# Altium PCB PCB1.PcbDoc
Units mm, origin at the board's own origin, x right, y up, seen from the top; angles counter-clockwise.
Board outline 28.9 x 13.5 mm, 2 copper layers (Top Layer, Bottom Layer); 23 components, 18 nets, 67 pads, 8 vias.
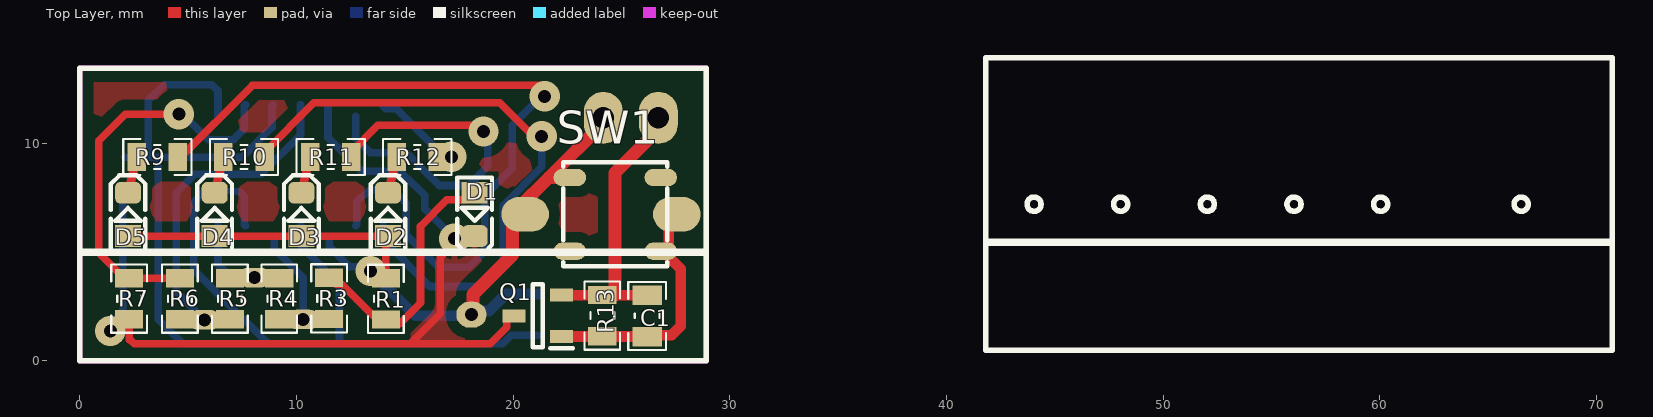
[diagram p0: Top Layer view]
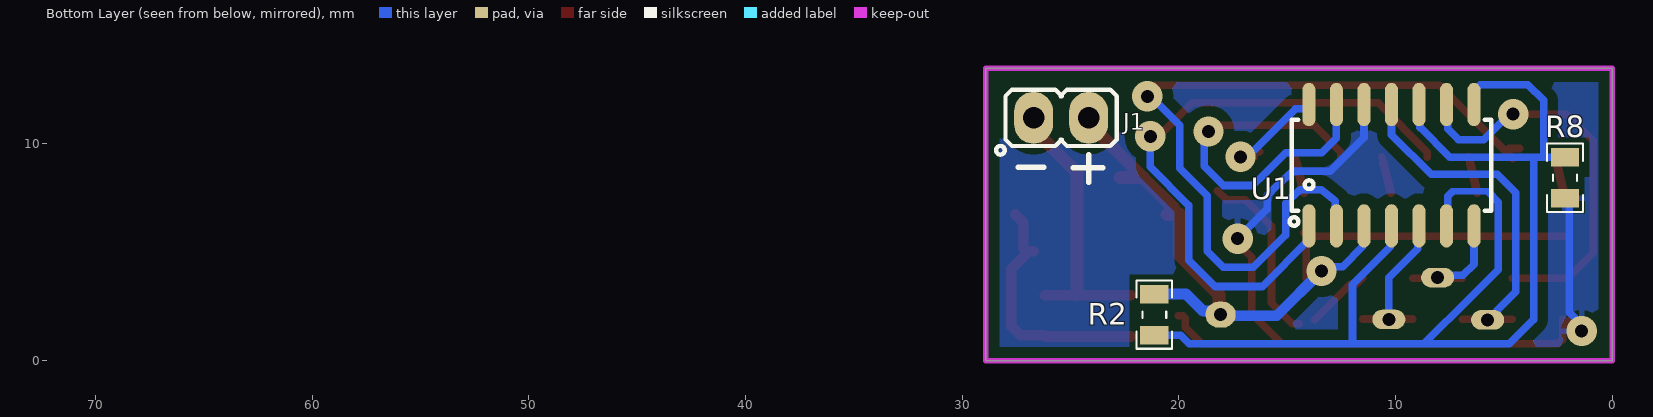
[diagram p1: Bottom Layer view, seen from below]
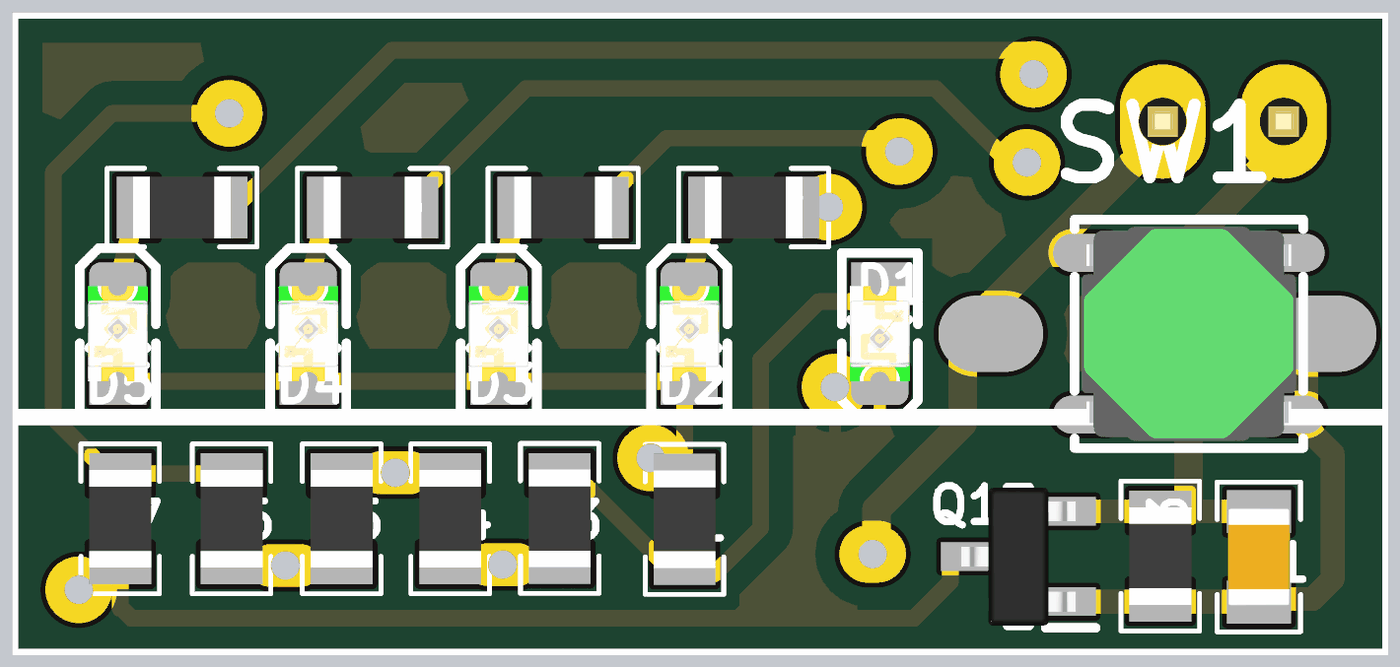
[diagram p2: 3D render of the assembled board from above, using the file's embedded part models]
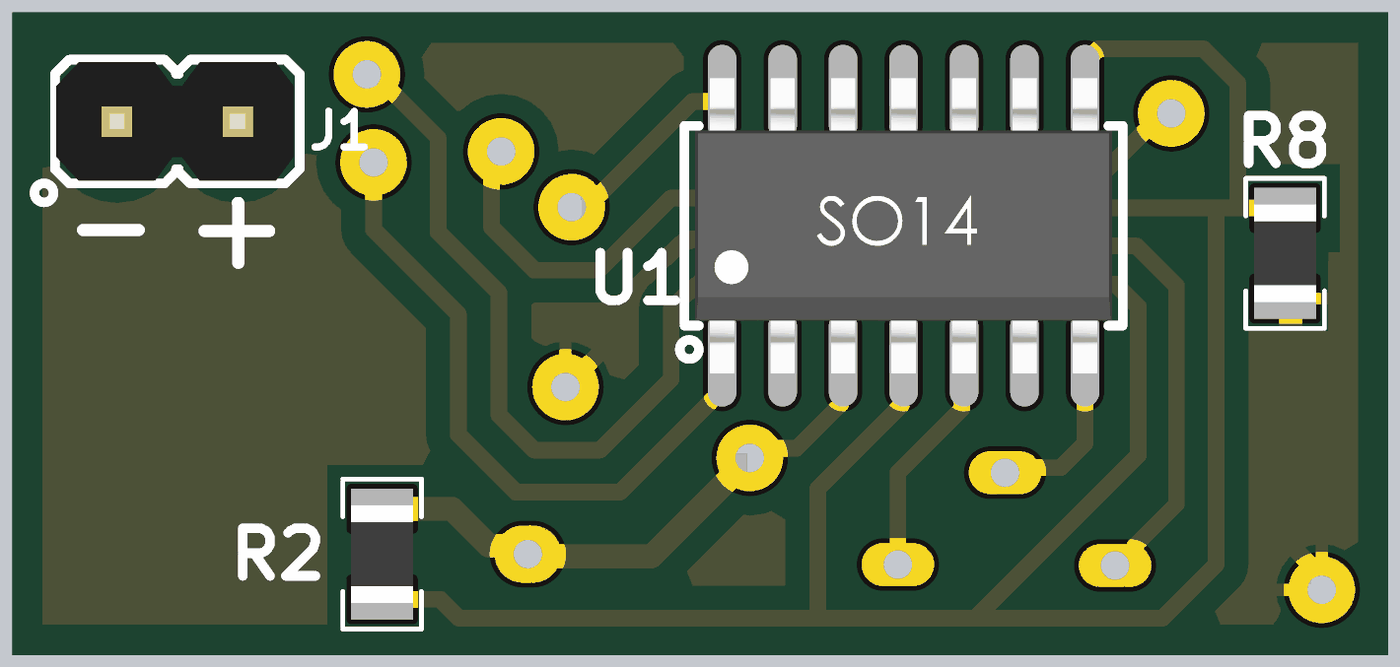
[diagram p3: 3D render of the assembled board from below, using the file's embedded part models]

## Layer stack, top to bottom
Top Solder: solder mask 0.0102, Solder Resist, Dk 3.5
Top Layer: signal copper 0.0356
Dielectric 1: dielectric 0.32, FR-4, Dk 4.8
Bottom Layer: signal copper 0.0356
Bottom Solder: solder mask 0.0102, Solder Resist, Dk 3.5

## Board outline
0,0 0,13.5 28.9,13.5 28.9,0

## Design rules (kind name [scope] priority, off if disabled: settings)
Clearance Clearance_1 [InNamedPolygon('G_Drain') Or InNamedPolygon('G_Drain')] p1: gap=0.5 ignorepadtopadclearanceinfootprint=FALSE
Clearance [All] p2: gap=0.45 ignorepadtopadclearanceinfootprint=FALSE
PolygonConnect [All] p1: connectstyle=Relief reliefconductorwidth=0.254 reliefentries=4 polygonreliefangle="90 Angle" airgapwidth=0.254
RoutingVias [All] p1: holewidth=0.7 width=1.4 viastyle="Through Hole" minholewidth=0.6 minwidth=1.27 maxholewidth=0.711 maxwidth=1.4
SolderMaskExpansion [All] p1: expansion=0.102 istentingtop=FALSE
Width [All] p1: maxlimit=0.8 minlimit=0.254 preferedwidth=0.35
30 further rules are at their usual default settings.

## Components (designator, comment, footprint, x,y, rotation, side; value= is the part's Value field where it differs from the comment)
C1 "4.7uF" CAP0805 26.18,2.06 r270 top value=100nF
D1 "LED805RED" LED0805RED 18.22,6.75 r270 top
D2 "LED805RED" LED0805RED 14.22,6.75 r90 top
D3 "LED805YLW" LED0805YLW 10.22,6.75 r90 top
D4 "LED805YLW" LED0805YLW 6.22,6.75 r90 top
D5 "LED805GRN" LED0805GRN 2.22,6.75 r90 top
J1 "HDRM2" HDR_M_1X2 25.43,11.21 r180 bottom
Q1 "SI2302DS" SOT95P230X110-3N 21.13,2.07 r180 top
R1 "150R" RES0805 14.12,2.85 r90 top
R2 "10K" RES0805 21.13,2.12 r90 bottom
R3 "4.7K" RES0805 11.5,2.87 r90 top
R4 "1K" RES0805 9.2,2.86 r270 top
R5 "1K" RES0805 6.92,2.86 r90 top
R6 "1K" RES0805 4.61,2.86 r270 top
R7 "10K" RES0805 2.27,2.86 r90 top
R8 "7.4K" RES0805 2.17,8.44 r90 bottom
R9 "100R" RES0805 3.57,9.4 r180 top
R10 "100R" RES0805 7.57,9.4 r180 top
R11 "100R" RES0805 11.57,9.4 r180 top
R12 "100R" RES0805 15.57,9.4 r180 top
R13 "820K" RES0805 24.11,2.08 r270 top
SW1 "PUSHBUTTON" SWPBS_SPDT_4X4SKRM 24.71,6.75 r0 top
U1 "LM339" SO_14 10.18,9.02 r90 bottom

## Footprints (in the part's own frame and the unit in brackets; to place one, negate y for a bottom-side part, rotate by r counter-clockwise, add the part's x,y. Pads: shape width x height; smd on the part's side, far side on the other; paste and mask are expansions set on the pad)
CAP0805 [mm] "Chip Capacitor, 2-Leads, Body 2/00x1/25mm, IPC Medium Density DESIGNER:ABBAS BASEREH"
  rect 0.9x1.35 smd: 1(-0.95,0) 2(0.95,0)
  silkscreen extent -1.58,-0.87 1.58,0.87, body extent -1.02,-0.65 1.02,0.65, height 0.5
HDR_M_1X2 [mm] "Connector; Header; 2 Position"
  oval 1.8x2.4 hole 1 mask+0.1: 1(-1.27,0) 2(1.27,0)
  silkscreen extent -3,-1.7 2.57,1.3, body extent -2.54,-1.25 2.44,1.25, height 8.72
LED0805GRN [mm] "LED SMD 0805, GREEN"
  rect 1x1.2 smd mask+0.075: 1(-1,0)
  rrect50% 1x1.2 smd mask+0.075: 2(1,0)
  Top Layer pour cut-out: -0.5,0.8 0.5,0.8 0.5,-0.8 -0.5,-0.8
  silkscreen extent -1.7,-0.8 1.8,0.8, body extent -1,-0.63 1,0.63, height 0.7
LED0805RED [mm] "LED SMD 0805, RED"
  rect 1x1.2 smd mask+0.075: 1(-1,0)
  rrect50% 1x1.2 smd mask+0.075: 2(1,0)
  Top Layer pour cut-out: -0.5,0.8 0.5,0.8 0.5,-0.8 -0.5,-0.8
  silkscreen extent -1.7,-0.8 1.8,0.8, body extent -1,-0.63 1,0.63, height 0.7
LED0805YLW [mm] "LED SMD 0805, YELLOW"
  rect 1x1.2 smd mask+0.075: 1(-1,0)
  rrect50% 1x1.2 smd mask+0.075: 2(1,0)
  Top Layer pour cut-out: -0.5,0.8 0.5,0.8 0.5,-0.8 -0.5,-0.8
  silkscreen extent -1.7,-0.8 1.8,0.8, body extent -1,-0.63 1,0.63, height 0.7
RES0805 [mm] "Chip Resistor, 2-Leads, Body 2/00x1/25mm, IPC Medium Density DESIGNER:ABBAS BASEREH"
  rect 0.85x1.3 smd: 1(-0.95,0) 2(0.95,0)
  silkscreen extent -1.58,-0.82 1.58,0.82, body extent -1.02,-0.65 1.02,0.65, height 0.5
SO_14 [mm] "SOP, SOIC, 3.9mm width, 1.27mm pitch,"
  oval 2x0.6 smd: 1(-2.8,3.81) 2(-2.8,2.54) 3(-2.8,1.27) 4(-2.8,0) 5(-2.8,-1.27) 6(-2.8,-2.54) 7(-2.8,-3.81) 8(2.8,-3.81) 9(2.8,-2.54) 10(2.8,-1.27) 11(2.8,0) 12(2.8,1.27) 13(2.8,2.54) 14(2.8,3.81)
  silkscreen extent -2.8,-4.6 2.1,4.7, body extent -3.1,-4.37 3.1,4.38, height 1.75
SOT95P230X110-3N [mm]
  rect 1.05x0.6 smd: 1(-1.1,0.95) 2(-1.1,-0.95) 3(1.1,0)
  silkscreen extent -1.63,-1.45 0.23,1.5, body extent -1.2,-1.45 1.2,1.45, height 0.95
SWPBS_SPDT_4X4SKRM [mm] "SWITCH, PUSHBUTTON, SMD, SPDT, SKRM Series ; Height 0.4 mm ; 500,000 cycles ; 1.57N Force, SKRMAAE010"
  oval 1.5x0.8 smd mask+0.1: 1(-2.1,1.7) 2(-2.1,-1.7) 3(2.1,-1.7) 4(2.1,1.7)
  silkscreen extent -2.4,-2.4 2.4,2.4, body extent -2.25,-2.25 2.25,2.25, height 0.4

## Part data
C1: library part "CAP SMD PACKAGE", "TOTAL CAPACITOR SMD PACK", Data=2017-3-10, Desc.="CAP SMD TOTAL PACKAGES", Designer="Abbas Basereh"
D1 D2: library part LED_SMD_0805_RED, "LED, SMD, 0805, RED", ASSEMBLY=ASSEMBLY, DESC=DESCRIPTION, MANF=MANF, MANF_P#=MANF_PART#, PARAM2=2.2V, PRICE=36t@Javan
D3 D4: library part LED_SMD_0805_YLW, "LED, SMD, 0805, YELLOW", ASSEMBLY=ASSEMBLY, DESC=DESCRIPTION, MANF=MANF, MANF_P#=MANF_PART#, PARAM2=2.2V, PRICE=36t@Javan
D5: library part LED_SMD_0805_GRN, "LED, SMD, 0805, GREEN", ASSEMBLY=ASSEMBLY, DESC=DESCRIPTION, MANF=-, MANF_P#=-, PARAM=20mA, PARAM2=2.2V, PRICE=36t@Javan
J1: library part HDR_M_1X2, "CONN, HEADER, Male, pitch: 2.54mm, 2POS"
Q1: "MOSFET (N-Channel)", Manufacturer_Name=Nexperia, Mouser Part Number=N/A, Datasheet Link=https://assets.nexperia.com/documents/data-sheet/SI2302DS.pdf, Height=1.1mm, Manufacturer_Part_Number=SI2302DS, Mouser Price/Stock=https://www.mouser.com/Search/Refine.aspx?Keyword=N%2FA
R1 R2 R3 R4 R5 R6 R7 R8 R9 R10 R11 R12 R13: library part "RES SMD PACKAGE", "TOTAL SMD RESISTOR PACK", Data=2017-3-10, Desc.="RES SMD PAKAGES", Designer="Abbas Basereh"
SW1: library part SWPBS_SPDT_4X4_SKRMAAE010, "SWITCH, PUSH BUTTON, TACTILE, SMD, SPDT, 4X4MM", ASSEMBLY=ASSEMBLY, DESC=DESCRIPTION, MANF=ALPS, MANF_P#=SKRMAAE010, PARAM=PARAM, PRICE=PRICE
U1: library part LM339_SOP14, "Comparator, Quad", MANF="ST, Texas Instruments, ON", MANF_P#="LM339DT, LM339ADT, LM339MX, LM339AMX, LM339M, LM339AM, LM339DR2G", PARAM2="+2~+36 V, ±1~±18V"

## Free pads (board coordinates)
  oval 1.524x0.9 hole 0.6: 2(5.74,1.88) 2(10.3,1.9) 3(8.05,3.83)
  oval 1.4x1.2 hole 0.6: 4(18.07,2.12)
  oval 2.2x1.6 smd: 5(20.55,6.75) 6(27.55,6.75)

## Via types
v1: diameter 1.4, hole 0.6, Top Layer to Bottom Layer, 8 vias

## Nets (pads, with @x,y where several pads share a name; then routed paths per layer and width w, separated by ;. In a path a pad name is that pad's centre, name@x,y a point inside that pad or via, vN(x,y) a via of type N, cw(c..) or ccw(c..) an arc to the next point about the centre after c; other vN are vias at no path point)
3.7V: D2.1 D3.1 D4.1 D5.1 J1.2 pad.4 pad.5 R1.2 R2.2 SW1.1 U1.3 | length 38.4
  Top Layer w0.35: D5.1 D4.1 D3.1 14.07,5.75 D2.1@14.22,5.9 ; R1.2 D2.1@14.12,5.52
  Top Layer w0.6: pad.4 18.151,2.201 18.151,3.061 19.96,4.87 19.96,6.76 19.97,6.75 pad.5 ; pad.5@20.25,7.05 21.65,8.45 ; SW1.1@22.71,8.45 21.65,8.45 ; J1.2 24.16,10.96 21.65,8.45
  Bottom Layer w0.35: U1.3@11.45,5.69 11.498,5.642 11.498,5.272 12.429,4.341 v1@13.209,4.341 ; pad.4@17.985,2.07 pad.4@18.211,2.296
  Bottom Layer w0.5: v1@13.209,4.341 v1(13.41,4.14) 15.48,2.07 pad.4@17.985,2.07 ; pad.4@18.211,2.296 18.886,2.296 19.66,3.07 R2.2
G_Drain: D1.2 Q1.3 R7.1 R8.1 U1.12 | length 41.8
  Top Layer w0.35: R7.1@1.95,1.88 R7.1@2.25,1.58 ; R7.1 2.27,0.975 2.301,0.975 2.506,0.77 15.24,0.77 ; v1(17.28,5.63) 17.28,5.43 16.63,4.78 16.63,2.16 15.24,0.77 ; Q1.3 19.827,2.07 19.702,1.945 19.702,1.532 18.94,0.77 15.24,0.77
  Bottom Layer w0.35: v1(1.4,1.37) 1.4,1.654 1.98,2.234 R8.1@1.98,7.49 ; U1.12 11.45,10.295 13,8.745 14.746,8.745 15.207,8.325 15.705,7.835 15.91,7.63 15.91,7 v1@17.36,5.55
GND: C1.1 J1.1 Q1.2 R13.1 | length 13
  Top Layer w0.35: R13.1@24.11,3.02 R13.1@24.115,3.025 ; R13.1 R13.1@24.115,3.025 ; R13.1@24.12,3.02 R13.1@24.115,3.025 ; C1.1@26.17,3.02 C1.1
  Top Layer w0.5: Q1.2 R13.1@24.11,3.02 ; R13.1@24.12,3.02 24.7,3.02 C1.1@26.17,3.02
  Top Layer w0.6: R13.1@24.7,3.02 24.7,8.67 26.7,10.67 J1.1
NetC1_2: C1.2 pad.6 Q1.1 R13.2 SW1.3 | length 11.7
  Top Layer w0.35: C1.2@26.17,1.12 C1.2
  Top Layer w0.5: Q1.1 C1.2@26.17,1.12 ; C1.2 26.243,1.173 27.303,1.173 27.73,1.6 27.73,4.23 SW1.3@26.91,5.05 ; SW1.3@26.71,5.05 SW1.3 SW1.3@26.91,5.05 ; pad.6 27.18,6.38 27.18,5.189 27.041,5.05 SW1.3@26.91,5.05
NetD1_1: D1.1 R1.1 R3.2 | length 11.4
  Top Layer w0.35: R3.2 11.798,3.522 12.088,3.522 R1.1@13.72,1.89 ; R1.1@14.43,1.71 14.76,1.71 15.72,2.67 15.72,6.21 16.935,7.425 17.795,7.425 D1.1@18.22,7.85
NetD2_2: D2.2 R12.2 | length 1.7
  Top Layer w0.35: R12.2@14.548,9.103 R12.2
  Top Layer w0.4: D2.2 R12.2@14.548,9.103
NetD3_2: D3.2 R11.2 | length 1.7
  Top Layer w0.35: R11.2@10.548,9.103 R11.2
  Top Layer w0.4: D3.2 R11.2@10.548,9.103
NetD4_2: D4.2 R10.2 | length 1.7
  Top Layer w0.35: R10.2@6.548,9.103 R10.2
  Top Layer w0.4: D4.2 R10.2@6.548,9.103
NetD5_2: D5.2 R9.2 | length 1.7
  Top Layer w0.35: R9.2@2.548,9.103 R9.2
  Top Layer w0.4: D5.2 R9.2@2.548,9.103
NetR2_1: R2.1 R8.2 U1.4 U1.6 U1.8 U1.10 | length 59.7
  Bottom Layer w0.3: 5.72,7.82 7.331,7.82 7.356,7.795
  Bottom Layer w0.35: R8.2@2.065,9.395 3.18,9.395 ; 5.721,7.789 5.25,7.319 5.25,4.2 6.495,2.955 6.497,2.955 8.682,0.77 ; U1.8@6.37,11.29 6.37,12.452 6.082,12.74 3.89,12.74 3.16,12.01 3.16,9.415 3.18,9.395 ; 7.356,7.795 7.375,7.795 7.592,7.578 7.592,6.268 U1.6 ; U1.10 8.862,11.772 8.862,10.762 7.495,9.395 3.62,9.395 ; U1.4 10.228,6.172 10.228,5.252 11.98,3.5 11.98,0.79 12,0.77 ; R2.1 19.91,1.17 19.51,0.77 12,0.77 ; 3.18,9.395 3.62,9.395 ; 3.62,9.395 3.62,1.9 4.75,0.77 8.682,0.77 ; 8.682,0.77 12,0.77
NetR3_1: pad.2@10.3,1.9 R3.1 R4.2 U1.5 | length 6.7
  Top Layer w0.35: R4.2 9.21,1.92 R3.1
  Bottom Layer w0.35: U1.5@8.91,5.69 8.958,5.642 8.958,5.172 10.3,3.83 pad.2@10.3,1.9
NetR4_1: pad.3 R4.1 R5.2 U1.7 | length 6
  Top Layer w0.35: R5.2 R4.1
  Bottom Layer w0.35: U1.7 6.37,4.45 6.885,3.935 7.945,3.935 pad.3
NetR5_1: pad.2@5.74,1.88 R5.1 R6.2 U1.11 | length 17
  Top Layer w0.35: R6.2 R5.1
  Bottom Layer w0.35: pad.2@5.74,1.88 5.577,1.88 5.323,2.134 5.323,2.297 4.45,3.17 4.45,7.75 5.295,8.595 8.345,8.595 10.18,10.43 U1.11
NetR6_1: R6.1 R7.2 U1.9 | length 18.5
  Top Layer w0.35: v1(4.56,11.38) 2.1,11.38 0.867,10.148 0.867,4.988 1.795,4.06 2.045,3.81 R7.2 R6.1
  Bottom Layer w0.35: v1(4.56,11.38) 4.74,11.38 5.925,10.195 7.085,10.195 7.592,10.702 7.592,11.772 U1.9
NetR9_1: R9.1 U1.2 | length 36.9
  Top Layer w0.35: R9.1@4.27,9.792 R9.1@4.745,9.792 ; R9.1@4.59,9.33 7.965,12.705 21.265,12.705 v1@21.27,12.7
  Bottom Layer w0.35: U1.2 12.768,6.268 12.768,7.357 13.431,7.895 14.394,7.895 14.855,7.475 15.06,7.27 15.06,5.8 16.555,4.305 17.935,4.305 18.68,5.05 18.68,7.61 19.955,8.885 19.955,10.869 21.286,12.2 v1(21.45,12.2)
NetR10_1: R10.1 U1.1 | length 28
  Top Layer w0.35: R10.1 8.52,9.625 10.8,11.905 19.385,11.905 v1@20.744,10.546
  Bottom Layer w0.35: U1.1 13.99,5.57 16.14,3.42 18.32,3.42 19.53,4.63 19.53,7.16 21.31,8.94 v1(21.31,10.35)
NetR11_1: R11.1 U1.13 | length 17.1
  Top Layer w0.35: R11.1 12.52,9.625 13.755,10.86 18.091,10.86 18.371,10.58 v1(18.63,10.58)
  Bottom Layer w0.35: U1.13@12.72,11.29 12.72,10.27 13.39,9.6 15.065,9.6 15.665,9 16.036,8.635 16.586,8.085 17.935,8.085 18.831,8.981 18.831,10.379 v1(18.63,10.58)
NetR12_1: R12.1 U1.14 | length 5.3
  Top Layer w0.35: R12.1@16.26,9.64 R12.1@16.76,9.64 ; R12.1 R12.1@16.76,9.64 ; v1(17.15,9.41) 17.15,9.31 17.12,9.28 R12.1@16.76,9.64
  Bottom Layer w0.35: U1.14 13.99,11.746 14.105,11.63 14.61,11.63 v1@16.779,9.461
pads on no net: SW1.2 SW1.4

## Polygon pours and split planes (outlines as drawn)
G_Drain on Bottom Layer "G_Drain" (solid, pour order 0): 28.9,13.5 28.9,0 0,0 0,13.5
G_Drain on Top Layer "G_Drain" (solid, pour order 2): 28.9,13.5 0,13.5 0,0 28.9,0

## Keep-outs
Keep-Out Layer:
  the board outline again, w0.254

## Other copper
Top Layer:
  pour cut-out: 21.94,3.67 20.32,3.67 20.31,3.68 20.31,0.55 21.92,0.55 21.95,0.52

## Silkscreen, mask and mechanical layers (free items; w line width, h text height)
Top Overlay:
  circle w0.254: c44.04,7.22 r0.326
  circle w0.254: c66.53,7.22 r0.326
  circle w0.254: c60.04,7.22 r0.326
  circle w0.254: c56.04,7.22 r0.326
  circle w0.254: c52.04,7.22 r0.326
  circle w0.254: c48.04,7.22 r0.326
  lines w0.254: 0,0 28.9,0 28.9,13.5 0,13.5 0,0 ; 41.82,0.47 41.82,13.97 70.72,13.97 70.72,0.47 41.82,0.47
  lines w0.35: 0.05,5 28.84,5 ; 41.87,5.47 70.66,5.47
Bottom Overlay:
  pour cut-out: 21.72,3.77
  lines w0.254: 23.5,8.91 24.86,8.91 ; 24.15,8.24 24.15,9.5 24.16,9.5 ; 26.24,8.93 27.41,8.93